# Altium PCB layout.PcbDoc
Units mm, origin at the board's own origin, x right, y up, seen from the top; angles counter-clockwise.
Board outline 118.87 x 64.13 mm, 2 copper layers (Top Layer, Bottom Layer); 58 components, 27 nets, 168 pads, 64 vias.
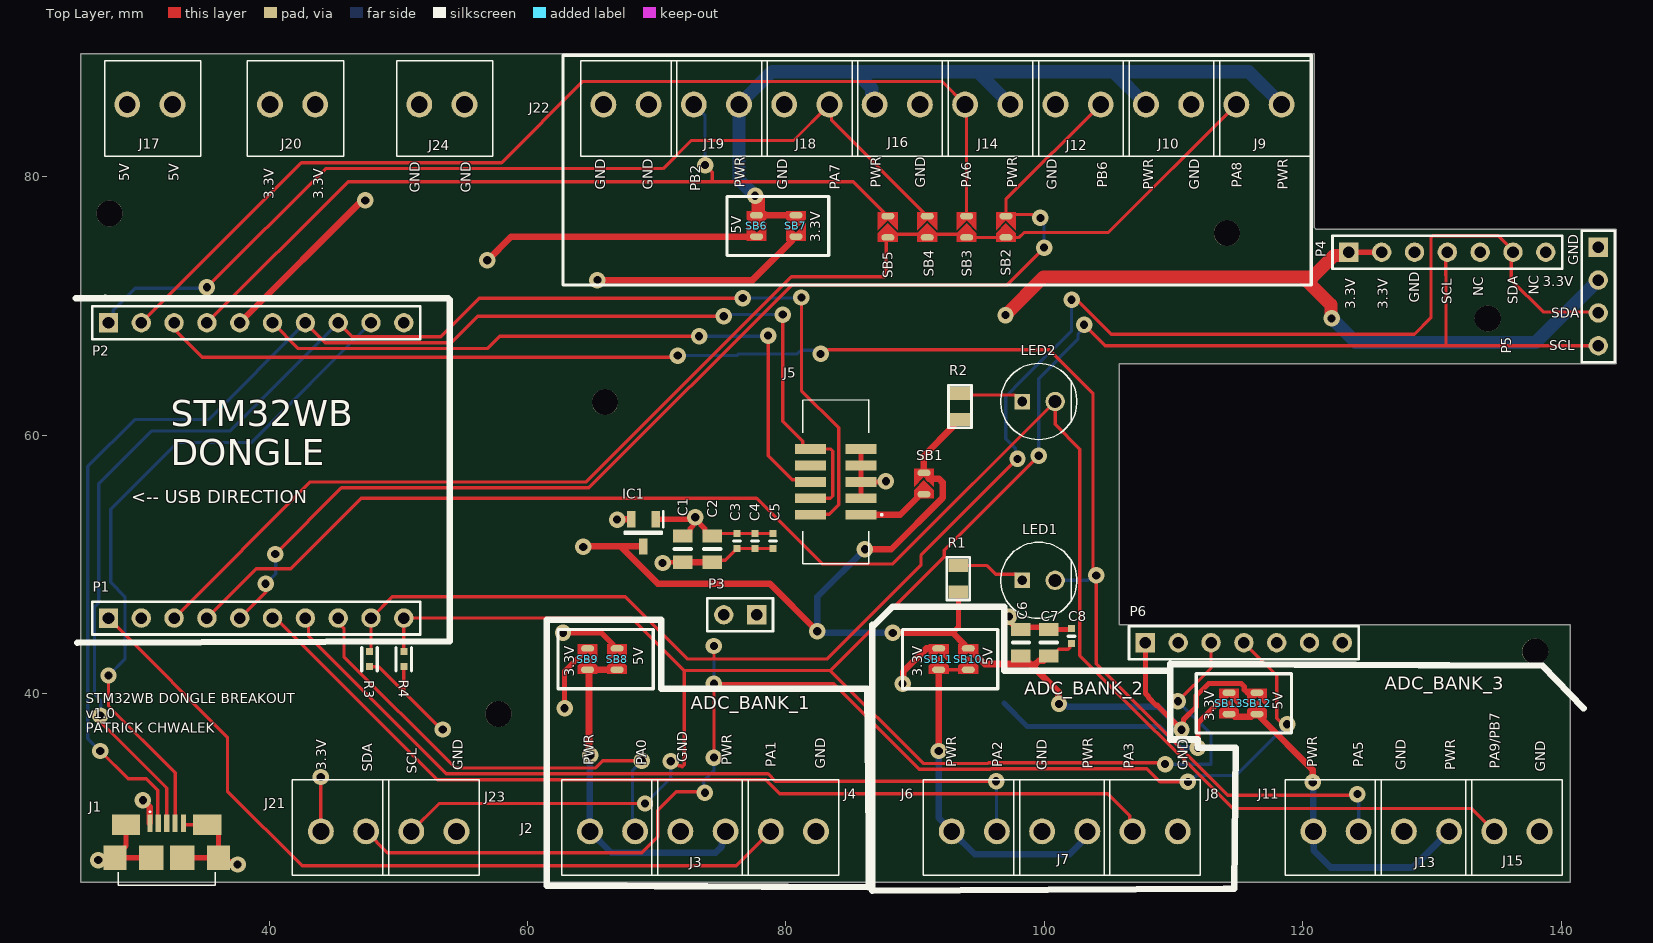
[diagram p0: Top Layer view]
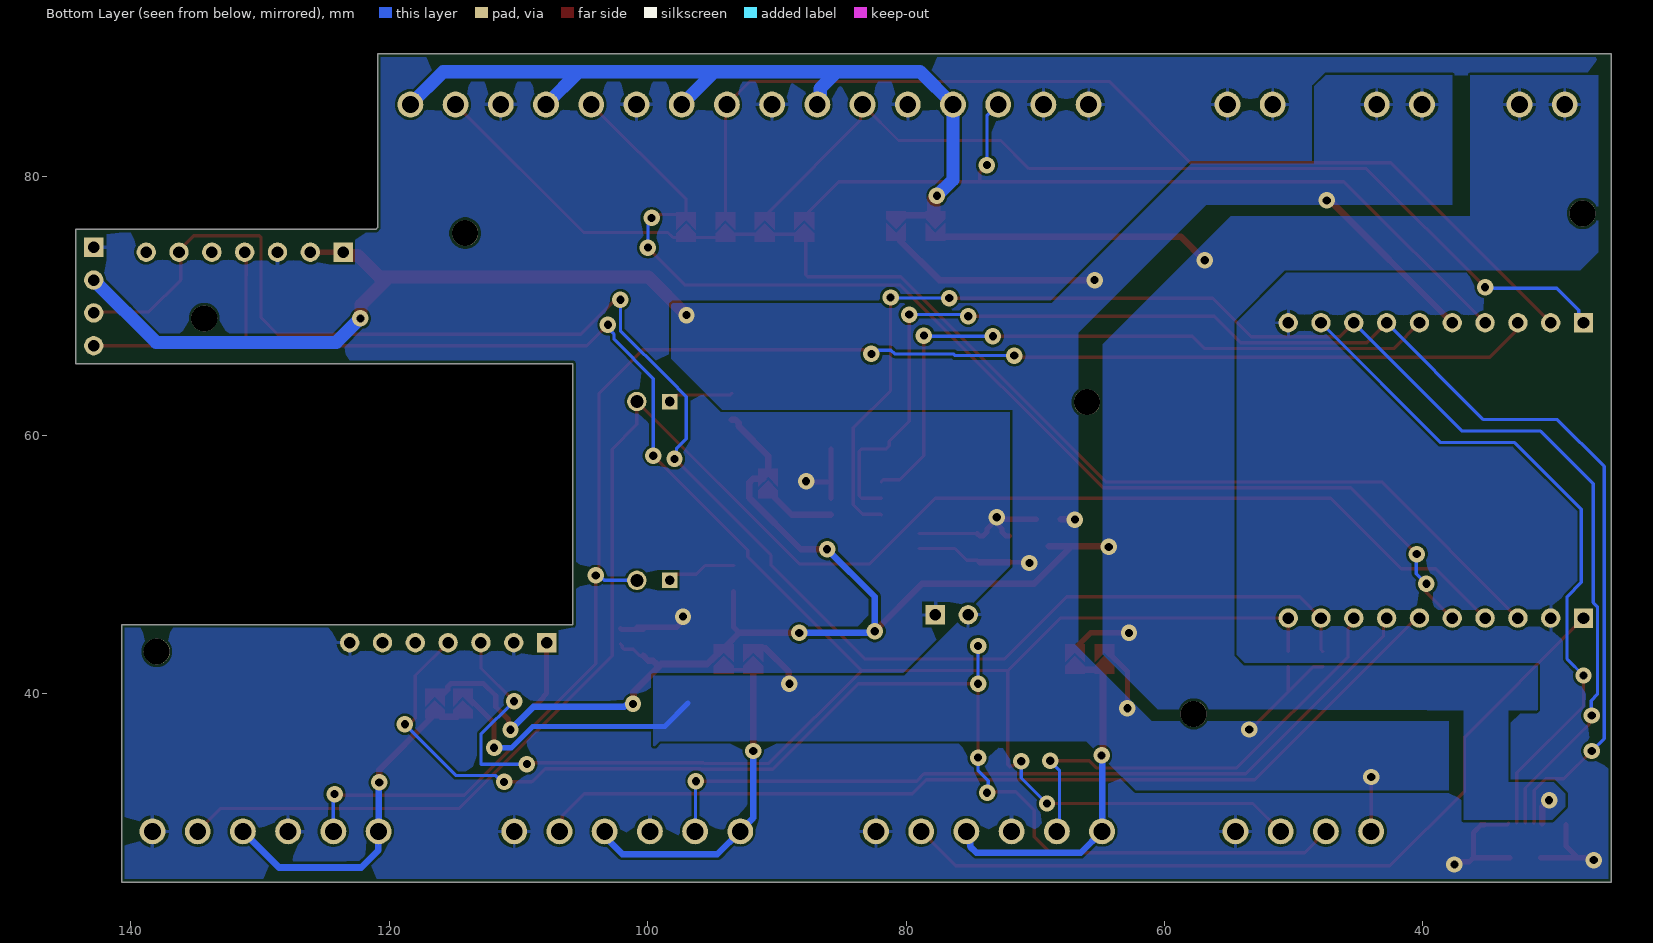
[diagram p1: Bottom Layer view, seen from below]
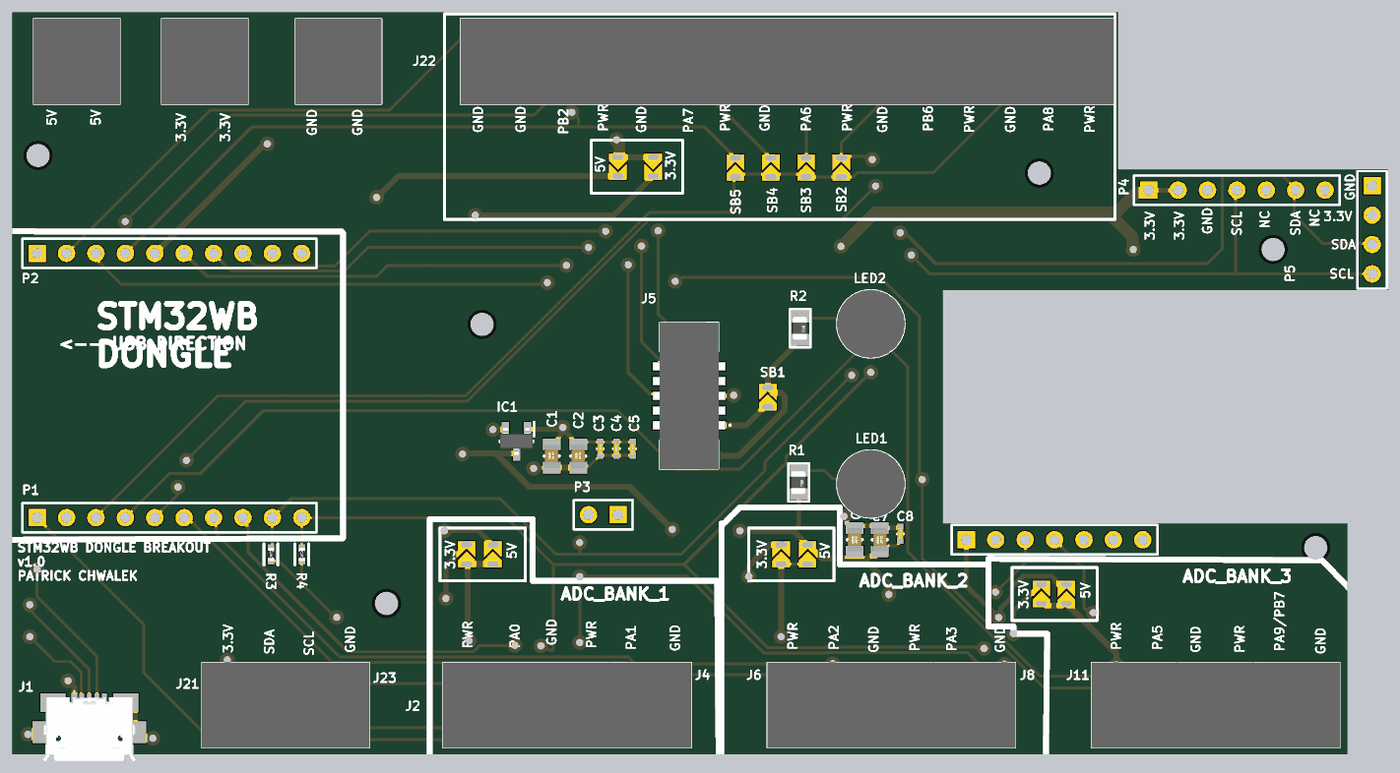
[diagram p2: 3D render of the assembled board from above, using the file's embedded part models]

## Layer stack, top to bottom
Top Solder: solder mask 0.0102, Solder Resist, Dk 3.5
Top Layer: signal copper 0.0356
Dielectric 1: dielectric 0.32, FR-4, Dk 4.8
Bottom Layer: signal copper 0.0356
Bottom Solder: solder mask 0.0102, Solder Resist, Dk 3.5

## Board outline
25.4,25.4 25.4,89.535 120.904,89.535 120.904,76.073 121.031,75.946 144.272,75.946 144.272,65.532 105.791,65.532 105.791,45.339 140.716,45.339 140.716,25.4

## Design rules (kind name [scope] priority, off if disabled: settings)
BoardOutlineClearance [All] p1: gap=0.254 ignorepadtopadclearanceinfootprint=FALSE except(0: Arc-SplitContinuation Track-SplitContinuation SMDPad-SplitContinuation THPad-SplitContinuation Via-SplitContinuation Fill-SplitContinuation Poly-SplitContinuation Region-SplitContinuation Text-SplitContinuation)
Clearance [All] p1: gap=0.203 ignorepadtopadclearanceinfootprint=FALSE except(0: Arc-Hole Track-Hole SMDPad-Hole THPad-Hole Via-Hole Fill-Hole Poly-Hole Region-Hole Text-Hole)
PlaneConnect [All] p1: planeconnectstyle=Direct reliefexpansion=0.508 reliefentries=4 reliefconductorwidth=0.254 reliefairgap=0.254
PolygonConnect [All] p1: connectstyle=Relief reliefconductorwidth=0.254 reliefentries=4 polygonreliefangle="90 Angle" airgapwidth=0.254
RoutingVias [All] p1: holewidth=0.254 width=0.508 viastyle="Through Hole" minholewidth=0.254 minwidth=0.508 maxholewidth=0.635 maxwidth=1.27
SolderMaskExpansion [All] p1: expansion=0.102 istentingtop=FALSE
Width PWR [InNet('5V')  OR InNet('3.3V')OR InNet('GND') OR InNet('ADC_BANK_1_PWR')     OR InNet('ADC_BANK_2_PWR') OR InNet('ADC_BANK_3_PWR') OR InNet('SOIL_TEMP_PWR')     or InNet('NetJ5_1')] p1: maxlimit=1.016 minlimit=0.254 preferedwidth=0.406 minimp=50.000000 maximp=50.000000 favimp=50.000000
Width [All] p2: maxlimit=0.254 minlimit=0.152 preferedwidth=0.203 minimp=50.000000 maximp=50.000000 favimp=50.000000
29 further rules are at their usual default settings.

## Classes and differential pairs
component class sch_expansion: P4 P5 P6
component class SoilSensorExpansion: J1 J2 J3 J4 J5 J6 J7 J8 J9 J10 J11 J12 J13 J14 J15 J16 J17 J18 J19 J20 J21 J22 J23 J24 LED1 LED2 P1 P2 R1 R2 R3 R4 SB1 SB2 SB3 SB4 SB5
component class sch_pwr: C1 C2 C3 C4 C5 C6 C7 C8 IC1 P3 SB6 SB7 SB8 SB9 SB10 SB11 SB12 SB13

## Components (designator, comment, footprint, x,y, rotation, side; value= is the part's Value field where it differs from the comment)
C1 "10µF" SMD-0805C 72.009,51.181 r0 top
C2 "100µF" SMD-0805C 74.295,51.181 r0 top
C3 "0.10µF" SMD-0402C 76.2,51.816 r180 top
C4 "0.47µF" SMD-0402C 77.597,51.816 r180 top
C5 "1µF" SMD-0402C 78.994,51.816 r180 top
C6 "10µF" SMD-0805C 98.181,43.942 r0 top
C7 "100µF" SMD-0805C 100.34,43.942 r0 top
C8 "0.10µF" SMD-0402C 102.108,44.45 r180 top
IC1 "MCP1700T-3302E_TT" SOT95P237X112-3N 68.961,52.451 r270 top
J1 "ZX62-B-5PA(33)" ZX62B5PA33 32.067,28.03 r0 top
J2 "691214110002S" 691214110002S 64.826,29.337 r0 top
J3 "691214110002S" 691214110002S 71.826,29.337 r0 top
J4 "691214110002S" 691214110002S 78.826,29.337 r0 top
J5 "3221-10-0300-00" 322110030000 83.865,56.388 r90 top
J6 "691214110002S" 691214110002S 92.826,29.337 r0 top
J7 "691214110002S" 691214110002S 99.826,29.337 r0 top
J8 "691214110002S" 691214110002S 106.826,29.337 r0 top
J9 "691214110002S" 691214110002S 118.364,85.598 r180 top
J10 "691214110002S" 691214110002S 111.364,85.598 r180 top
J11 "691214110002S" 691214110002S 120.826,29.337 r0 top
J12 "691214110002S" 691214110002S 104.364,85.598 r180 top
J13 "691214110002S" 691214110002S 127.826,29.337 r0 top
J14 "691214110002S" 691214110002S 97.364,85.598 r180 top
J15 "691214110002S" 691214110002S 134.826,29.337 r0 top
J16 "691214110002S" 691214110002S 90.364,85.598 r180 top
J17 "691214110002S" 691214110002S 32.512,85.598 r180 top
J18 "691214110002S" 691214110002S 83.364,85.598 r180 top
J19 "691214110002S" 691214110002S 76.364,85.598 r180 top
J20 "691214110002S" 691214110002S 43.561,85.598 r180 top
J21 "691214110002S" 691214110002S 43.998,29.337 r0 top
J22 "691214110002S" 691214110002S 69.364,85.598 r180 top
J23 "691214110002S" 691214110002S 50.998,29.337 r0 top
J24 "691214110002S" 691214110002S 55.118,85.598 r180 top
LED1 "151051BS04000" 151051BS04000 98.298,48.768 r0 top
LED2 "151051BS04000" 151051BS04000 98.298,62.611 r0 top
P1 "Header 10" HDR1X10 27.559,45.847 r0 top
P2 "Header 10" HDR1X10 27.559,68.707 r0 top
P3 "Header 2" HDR1X2 77.724,46.101 r180 top
P4 "Header 7" HDR1X7 123.571,74.168 r0 top
P5 "Header 4" HDR1X4 142.875,74.549 r270 top
P6 "Header 7" HDR1X7 107.823,43.942 r0 top
R1 "TBD" SMD-0805-RES 93.345,48.895 r180 top value=54.9k
R2 "TBD" SMD-0805-RES 93.472,62.23 r180 top value=54.9k
R3 "4.7k" SMD-0402-RES 47.752,42.672 r0 top
R4 "4.7k" SMD-0402-RES 50.419,42.672 r0 top
SB1 "SOLDER_JUMPER" JUMPER_SMD 90.678,56.515 r90 top
SB2 "SOLDER_JUMPER" JUMPER_SMD 97.028,76.391 r90 top
SB3 "SOLDER_JUMPER" JUMPER_SMD 93.98,76.391 r90 top
SB4 "SOLDER_JUMPER" JUMPER_SMD 90.932,76.391 r90 top
SB5 "SOLDER_JUMPER" JUMPER_SMD 87.884,76.391 r90 top
SB6 "SOLDER_JUMPER" JUMPER_SMD 77.724,75.946 r270 top
SB7 "SOLDER_JUMPER" JUMPER_SMD 80.772,75.946 r270 top
SB8 "SOLDER_JUMPER" JUMPER_SMD 66.929,42.926 r90 top
SB9 "SOLDER_JUMPER" JUMPER_SMD 64.643,42.926 r90 top
SB10 "SOLDER_JUMPER" JUMPER_SMD 94.107,42.926 r90 top
SB11 "SOLDER_JUMPER" JUMPER_SMD 91.821,42.926 r90 top
SB12 "SOLDER_JUMPER" JUMPER_SMD 116.459,39.497 r90 top
SB13 "SOLDER_JUMPER" JUMPER_SMD 114.3,39.497 r90 top

## Footprints (in the part's own frame and the unit in brackets; to place one, negate y for a bottom-side part, rotate by r counter-clockwise, add the part's x,y. Pads: shape width x height; smd on the part's side, far side on the other; paste and mask are expansions set on the pad)
151051BS04000 [mm]
  rect 1.2x1.2 hole 0.75: 1(0,0)
  round 1.5 hole 1: 2(2.54,0)
  silkscreen extent -1.68,-2.95 4.22,2.95, body extent -1.68,-2.95 4.22,2.95, height 9.05
322110030000 [mm]
  rect 0.76x2.4 smd: 1(-2.54,-1.95) 2(-2.54,1.95) 3(-1.27,-1.95) 4(-1.27,1.95) 5(0,-1.95) 6(0,1.95) 7(1.27,-1.95) 8(1.27,1.95) 9(2.54,-1.95) 10(2.54,1.95)
  silkscreen extent -6.35,-3.6 6.35,2.55, body extent -6.32,-3.07 6.32,3.07, height 5.9
691214110002S [mm]
  round 2 hole 1.3: 1(0,0) 2(3.5,0)
  silkscreen extent -2.2,-3.4 5.25,4, body extent -2.2,-3.4 5.25,4, height 8.8
HDR1X2 [mm] "Connector; Header; 2 Position"
  rect 1.5x1.5 hole 0.9: 1(0,0)
  round 1.5 hole 0.9: 2(2.54,0)
  silkscreen extent -1.27,-1.27 3.81,1.27
HDR1X4 [mm] "Connector; Header; 4 Position"
  rect 1.5x1.5 hole 0.9: 1(0,0)
  round 1.5 hole 0.9: 2(2.54,0) 3(5.08,0) 4(7.62,0)
  silkscreen extent -1.27,-1.27 8.89,1.27
HDR1X7 [mm] "Connector; Header; 7 Position"
  rect 1.5x1.5 hole 0.9: 1(0,0)
  round 1.5 hole 0.9: 2(2.54,0) 3(5.08,0) 4(7.62,0) 5(10.16,0) 6(12.7,0) 7(15.24,0)
  silkscreen extent -1.27,-1.27 16.51,1.27
HDR1X10 [mm] "Connector; Header; 10 Position"
  rect 1.5x1.5 hole 0.9: 1(0,0)
  round 1.5 hole 0.9: 2(2.54,0) 3(5.08,0) 4(7.62,0) 5(10.16,0) 6(12.7,0) 7(15.24,0) 8(17.78,0) 9(20.32,0) 10(22.86,0)
  silkscreen extent -1.27,-1.27 24.13,1.27
JUMPER_SMD [mil]
  oval 20x40 smd paste+0 mask+0: 1(-42.5,0) 2(22.5,0)
  Top Layer region: -55,30 -55,-30 -30,-30 0,0 -30,30
  Top Layer region: -20,30 10,0 -20,-30 35,-30 35,30
SMD-0402-RES [mm]
  rect 0.55x0.55 smd: 1(0,0.584) 2(0,-0.584)
  silkscreen extent -0.6,-0.9 0.6,0.9, body extent -0.28,-0.57 0.27,0.58, height 0.41
SMD-0402C [mm]
  rect 0.55x0.55 smd: 1(0,0.584) 2(0,-0.584)
  silkscreen extent -0.25,0 0.25,0, body extent -0.25,-0.51 0.25,0.51, height 0.51
SMD-0805-RES [mil]
  rect 60x40 smd: 1(0,40) 2(0,-40)
  silkscreen extent -35,-65 35,65, body extent -24,-39 26,39, height 31
SMD-0805C [mil]
  rect 60x40 smd: 1(0,40) 2(0,-40)
  silkscreen extent -25,0 25,0, body extent -25,-39 25,39, height 35
SOT95P237X112-3N [mm]
  rect 1.25x0.65 smd: 1(-1.05,0.95) 2(-1.05,-0.95) 3(1.05,0)
  silkscreen extent -1.68,-1.43 0.08,1.53, body extent -1.18,-1.43 1.18,1.43, height 1.12
ZX62B5PA33 [mm]
  rect 0.4x1.35 smd: 1(-1.3,1.95) 2(-0.65,1.95) 3(0,1.95) 4(0.65,1.95) 5(1.3,1.95)
  rect 2.2x1.6 smd: 6(-3.15,1.825) 7(3.15,1.825)
  rect 1.8x1.9 smd: 8(-4,-0.725) 11(4,-0.725)
  rect 1.9x1.9 smd: 9(-1.2,-0.725) 10(1.2,-0.725)
  silkscreen extent -3.75,-2.88 3.75,2.87, body extent -4.04,-3.3 4.04,2.3, height 2.78

## Part data
C1 C6: library part GCJ21BR71H683KA01L, "CAP CER 10UF 50V X7R 0805", Digi-Key Part Number=490-5807-1-ND, Manufacturer="Murata Electronics North America", Operating Temperature="-55°C ~ 125°C", Package / Case="0805 (2012 Metric)", Ratings=AEC-Q200, Temperature Coefficient=X7R, Tolerance=±10%, Voltage=50V, @ qty=0, Applications="Automotive, Boardflex Sensitive", Datasheets=http://www.murata.com/~/media/webrenewal/support/library/catalog/products/capacitor/mlcc/c03e.ashx, Factory Stock=0, Features="Soft Termination", Height - Seated (Max)=-, Image=//media.digikey.com/Renders/Murata%20Renders/0805%20(2012%20Metric)%20.85mm.jpg, Lead Spacing=-, Lead Style=-, Minimum Quantity=1, Mounting Type="Surface Mount, MLCC", Packaging="Cut Tape (CT)", Part Number=GCJ21BR71H683KA01L, Part Status=Active, Quantity Available=4490, Series=GCJ, Size / Dimension="0.079\" L x 0.049\" W (2.00mm x 1.25mm)", Thickness (Max)="0.057\" (1.45mm)", Unit Price (USD)=0.24
C2 C7: library part GCJ21BR71H683KA01L, "CAP CER 100UF 50V X7R 0805", Digi-Key Part Number=490-5807-1-ND, Manufacturer="Murata Electronics North America", Operating Temperature="-55°C ~ 125°C", Package / Case="0805 (2012 Metric)", Ratings=AEC-Q200, Temperature Coefficient=X7R, Tolerance=±10%, Voltage=50V, @ qty=0, Applications="Automotive, Boardflex Sensitive", Datasheets=http://www.murata.com/~/media/webrenewal/support/library/catalog/products/capacitor/mlcc/c03e.ashx, Factory Stock=0, Features="Soft Termination", Height - Seated (Max)=-, Image=//media.digikey.com/Renders/Murata%20Renders/0805%20(2012%20Metric)%20.85mm.jpg, Lead Spacing=-, Lead Style=-, Minimum Quantity=1, Mounting Type="Surface Mount, MLCC", Packaging="Cut Tape (CT)", Part Number=GCJ21BR71H683KA01L, Part Status=Active, Quantity Available=4490, Series=GCJ, Size / Dimension="0.079\" L x 0.049\" W (2.00mm x 1.25mm)", Thickness (Max)="0.057\" (1.45mm)", Unit Price (USD)=0.24
C3 C8: library part GCM155R71C104KA55D, "CAP CER 0.1UF 16V X7R 0402", Digi-Key Part Number=490-4759-1-ND, Manufacturer="Murata Electronics North America", Operating Temperature="-55°C ~ 125°C", Package / Case="0402 (1005 Metric)", Ratings=AEC-Q200, Temperature Coefficient=X7R, Tolerance=±10%, Voltage=16V, @ qty=0, Applications=Automotive, Datasheets=http://www.murata.com/~/media/webrenewal/support/library/catalog/products/capacitor/mlcc/c03e.ashx, Factory Stock=0, Features=-, Height - Seated (Max)=-, Image=//media.digikey.com/Renders/Murata%20Renders/ZRB-SERIES-0402.jpg, Lead Spacing=-, Lead Style=-, Minimum Quantity=1, Mounting Type="Surface Mount, MLCC", Packaging="Cut Tape (CT)", Part Number=GCM155R71C104KA55D, Part Status=Active, Quantity Available=734194, Series=GCM, Size / Dimension="0.039\" L x 0.020\" W (1.00mm x 0.50mm)", Thickness (Max)="0.022\" (0.55mm)", Unit Price (USD)=0.1
C4: library part GCM155R71C104KA55D, "CAP CER 0.47UF 16V X7R 0402", Digi-Key Part Number=490-4759-1-ND, Manufacturer="Murata Electronics North America", Operating Temperature="-55°C ~ 125°C", Package / Case="0402 (1005 Metric)", Ratings=AEC-Q200, Temperature Coefficient=X7R, Tolerance=±10%, Voltage=16V, @ qty=0, Applications=Automotive, Datasheets=http://www.murata.com/~/media/webrenewal/support/library/catalog/products/capacitor/mlcc/c03e.ashx, Factory Stock=0, Features=-, Height - Seated (Max)=-, Image=//media.digikey.com/Renders/Murata%20Renders/ZRB-SERIES-0402.jpg, Lead Spacing=-, Lead Style=-, Minimum Quantity=1, Mounting Type="Surface Mount, MLCC", Packaging="Cut Tape (CT)", Part Number=GCM155R71C104KA55D, Part Status=Active, Quantity Available=734194, Series=GCM, Size / Dimension="0.039\" L x 0.020\" W (1.00mm x 0.50mm)", Thickness (Max)="0.022\" (0.55mm)", Unit Price (USD)=0.1
C5: library part GCM155R71C104KA55D, "CAP CER 1UF 16V X7R 0402", Digi-Key Part Number=490-4759-1-ND, Manufacturer="Murata Electronics North America", Operating Temperature="-55°C ~ 125°C", Package / Case="0402 (1005 Metric)", Ratings=AEC-Q200, Temperature Coefficient=X7R, Tolerance=±10%, Voltage=16V, @ qty=0, Applications=Automotive, Datasheets=http://www.murata.com/~/media/webrenewal/support/library/catalog/products/capacitor/mlcc/c03e.ashx, Factory Stock=0, Features=-, Height - Seated (Max)=-, Image=//media.digikey.com/Renders/Murata%20Renders/ZRB-SERIES-0402.jpg, Lead Spacing=-, Lead Style=-, Minimum Quantity=1, Mounting Type="Surface Mount, MLCC", Packaging="Cut Tape (CT)", Part Number=GCM155R71C104KA55D, Part Status=Active, Quantity Available=734194, Series=GCM, Size / Dimension="0.039\" L x 0.020\" W (1.00mm x 0.50mm)", Thickness (Max)="0.022\" (0.55mm)", Unit Price (USD)=0.1
IC1: "Integrated Circuit", Arrow Part Number=MCP1700T-3302E/TT, Manufacturer_Name=Microchip, Mouser Part Number=579-MCP1700T3302E/TT, Arrow Price/Stock=https://www.arrow.com/en/products/mcp1700t-3302ett/microchip-technology, Datasheet Link=http://docs-emea.rs-online.com/webdocs/0dd1/0900766b80dd189b.pdf, Height=1.12mm, Manufacturer_Part_Number=MCP1700T-3302E/TT, Mouser Price/Stock=https://www.mouser.co.uk/ProductDetail/Microchip-Technology/MCP1700T-3302E-TT?qs=fM4xO01eazPmCNDrdHEdaw%3D%3D
J1: "Connector", Manufacturer_Name=Hirose, Mouser Part Number=798-ZX62-B-5PA33, RS Part Number=1362267, Datasheet Link=http://www.mouser.com/ds/2/185/ZX_catalog-939768.pdf, Height=2.8mm, Manufacturer_Part_Number=ZX62-B-5PA(33), Mouser Price/Stock=https://www.mouser.com/Search/Refine.aspx?Keyword=798-ZX62-B-5PA33, RS Price/Stock=http://uk.rs-online.com/web/p/products/1362267
J2 J3 J4 J6 J7 J8 J9 J10 J11 J12 J13 J14 J15 J16 J17 J18 J19 J20 J21 J22 J23 J24: "Connector", Manufacturer_Name="Wurth Elektronik", Mouser Part Number=710-691214110002S, Datasheet Link=https://katalog.we-online.de/em/datasheet/6912141100xx.pdf, Height=8.7mm, Manufacturer_Part_Number=691214110002S, Mouser Price/Stock=https://www.mouser.co.uk/ProductDetail/Wurth-Elektronik/691214110002S?qs=w%2Fv1CP2dgqrp3US926hqig%3D%3D
J5: "Connector", Manufacturer_Name="CNC Tech", Arrow Part Number=3221-10-0300-00, Arrow Price/Stock=https://www.arrow.com/en/products/3221-10-0300-00/cnc-tech-llc, Datasheet Link=http://cnctech.us/pdfs/3221-XX-0300-00.pdf, Height=5.8mm, Manufacturer_Part_Number=3221-10-0300-00
LED1 LED2: "LED", Manufacturer_Name="Wurth Elektronik", Mouser Part Number=710-151051BS04000, Datasheet Link=https://katalog.we-online.de/led/datasheet/151051BS04000.pdf, Height=8.95mm, Manufacturer_Part_Number=151051BS04000, Mouser Price/Stock=https://www.mouser.co.uk/ProductDetail/Wurth-Elektronik/151051BS04000?qs=LlUlMxKIyB3OjuZOlqaOjg%3D%3D
P1 P2: "Header, 10-Pin", LatestRevisionDate=17-Jul-2002, LatestRevisionNote="Re-released for DXP Platform.", Publisher="Altium Limited"
P3: "Header, 2-Pin", LatestRevisionDate=17-Jul-2002, LatestRevisionNote="Re-released for DXP Platform.", Publisher="Altium Limited"
P4 P6: "Header, 7-Pin", LatestRevisionDate=17-Jul-2002, LatestRevisionNote="Re-released for DXP Platform.", Publisher="Altium Limited"
P5: "Header, 4-Pin", LatestRevisionDate=17-Jul-2002, LatestRevisionNote="Re-released for DXP Platform.", Publisher="Altium Limited"
R1 R2: library part ERJ-6ENF5492V, "RES SMD 54.9K OHM 1% 1/8W 0805", Digi-Key Part Number=P54.9KCCT-ND, Manufacturer="Panasonic Electronic Components", Operating Temperature="-55°C ~ 155°C", Package / Case="0805 (2012 Metric)", Power (Watts)="0.125W, 1/8W", Supplier Device Package=0805, Temperature Coefficient=±100ppm/°C, Tolerance=±1%, @ qty=1500, Composition="Thick Film", Datasheets=http://industrial.panasonic.com/www-cgi/jvcr13pz.cgi?E+PZ+3+AOA0002+ERJ6ENF5492V+7+WW, Factory Stock=0, Failure Rate=-, Features="Automotive AEC-Q200", Height - Seated (Max)="0.028\" (0.70mm)", Image=//media.digikey.com/Renders/Panasonic%20Renders/ERJ-0805%20Pkg.jpg, Minimum Quantity=1, Number of Terminations=2, Packaging="Cut Tape (CT)", Part Number=ERJ-6ENF5492V, Part Status=Active, Quantity Available=38560, Series=ERJ, Size / Dimension="0.079\" L x 0.049\" W (2.00mm x 1.25mm)", Unit Price (USD)=0.00729
R3 R4: library part ERJ-2GEJ103X, "RES SMD 4.7K OHM 5% 1/10W 0402", Digi-Key Part Number=P10KJCT-ND, Manufacturer="Panasonic Electronic Components", Operating Temperature="-55°C ~ 155°C", Package / Case="0402 (1005 Metric)", Power (Watts)="0.1W, 1/10W", Supplier Device Package=0402, Temperature Coefficient=±200ppm/°C, Tolerance=±5%, @ qty=1500, Composition="Thick Film", Datasheets=http://industrial.panasonic.com/www-cgi/jvcr13pz.cgi?E+PZ+3+AOA0001+ERJ2GEJ103X+7+WW, Factory Stock=0, Failure Rate=-, Features="Automotive AEC-Q200", Height - Seated (Max)="0.016\" (0.40mm)", Image=//media.digikey.com/Photos/Panasonic%20Photos/ERJ-PA2-Series.jpg, Minimum Quantity=1, Number of Terminations=2, Packaging="Cut Tape (CT)", Part Number=ERJ-2GEJ103X, Part Status=Active, Quantity Available=2560215, Series=ERJ, Size / Dimension="0.039\" L x 0.020\" W (1.00mm x 0.50mm)", Unit Price (USD)=0.00350

## Free pads (board coordinates)
  round 2.02 hole 2.02 unplated mask+0.254: 1(27.638,77.168) 1(57.737,38.433) 1(65.992,62.563) 1(114.125,75.644) 1(134.318,69.04) 1(138.001,43.259)

## Via types
v1: diameter 1.27, hole 0.635, Top Layer to Bottom Layer, tented both sides, 64 vias

## Nets (pads, with @x,y where several pads share a name; then routed paths per layer and width w, separated by ;. In a path a pad name is that pad's centre, name@x,y a point inside that pad or via, vN(x,y) a via of type N, cw(c..) or ccw(c..) an arc to the next point about the centre after c; other vN are vias at no path point)
3.3V: C1.2 C2.2 C3.1 C4.1 C5.1 IC1.2 J20.1 J20.2 J21.1 P2.5 P3.2 P4.1 P4.2 P5.2 R3.2 R4.2 SB7.2 SB9.2 SB11.2 SB13.2 | length 145.4
  Top Layer w0.254: v1(43.991,33.55) 43.998,33.543 J21.1 ; R3.2 48.463,42.088 50.419,40.132 ; R4.2 50.419,40.132 ; v1(53.436,37.223) 53.352,37.223 53.34,37.211 50.419,40.132 ; v1(70.447,50.114) v1@70.498,50.165 ; C2.2 74.451,50.321 75.289,50.321 C3.1 C4.1 C5.1
  Top Layer w0.356: v1@70.498,50.165 C1.2
  Top Layer w0.406: v1(62.865,38.862) 62.865,41.723 64.37,43.227 64.37,43.451 64.416,43.497 SB9.2 ; v1(111.887,35.814) 111.887,37.719 114.027,39.859 114.027,40.022 114.073,40.069 SB13.2 ; P4.1 P4.2
  Top Layer w0.508: P2.5 47.371,78.359 47.371,78.243 v1(47.441,78.174) ; v1(65.405,72.009) 77.406,72.009 80.518,75.12 80.518,75.374 SB7.2 ; v1(66.929,53.467) 66.946,53.484 67.994,53.484 IC1.2 ; C1.2 C2.2 ; v1(89.027,40.767) 89.062,40.802 89.062,41.691 90.868,43.497 SB11.2
  Top Layer w1.016: v1(96.99,69.303) 99.949,72.263 120.015,72.263 ; v1(122.234,69.041) 122.234,69.021 122.174,68.961 122.174,70.104 120.015,72.263 ; P4.1 123.329,73.926 122.44,73.926 120.777,72.263 120.015,72.263
  Bottom Layer w0.406: 96.875,39.269 98.679,37.465 108.89,37.465 110.541,35.814 v1(111.887,35.814) ; v1(96.99,69.303) v1@97.028,69.342
  Bottom Layer w1.016: v1(122.234,69.041) 124.093,67.183 138.049,67.183 P5.2
5V: C6.2 C7.2 C8.1 IC1.3 J1.1 J17.1 J17.2 P6.1 R1.1 R2.1 SB1.2 SB6.2 SB8.2 SB10.2 SB12.2 | length 129.6
  Top Layer w0.254: C7.2@100.33,42.926 C7.2@100.335,42.931 ; C7.2 100.594,42.926 101.102,43.434 101.832,43.434 101.96,43.562 101.96,43.718 C8.1
  Top Layer w0.406: v1(62.738,44.704) 65.722,44.704 66.656,43.771 66.656,43.544 66.702,43.497 SB8.2 ; 92.9,44.704 93.345,45.148 R1.1 ; P6.1 107.823,40.005 108.052,39.776 108.052,39.701 108.662,39.091 108.737,39.091 v1(110.617,37.211) 110.773,37.367 110.773,38.002 111.76,38.989 111.76,39.83 112.722,40.792 115.23,40.792 115.468,40.554 115.468,40.307 115.706,40.069 SB12.2
  Top Layer w0.508: v1(30.226,31.75) 30.767,31.209 J1.1 ; v1(56.884,73.547) 56.884,73.545 56.896,73.533 58.737,75.374 SB6.2 ; v1(64.308,51.354) 64.355,51.401 67.186,51.401 ; IC1.3 67.186,51.401 ; v1(82.423,44.831) 78.74,48.514 70.073,48.514 67.186,51.401 ; v1(86.106,51.181) 88.15,51.181 92.119,55.15 92.119,56.344 91.821,56.642 91.059,56.642 ; v1(88.265,44.704) 92.9,44.704 93.853,43.752 93.853,43.497 SB10.2 ; SB1.2 90.678,58.42 92.964,60.706 92.964,60.96 93.218,61.214 R2.1 ; SB10.2@94.296,43.383 95.389,42.291 98.933,42.291 101.094,40.13 101.094,39.241 v1(101.13,39.205) ; 99.314,42.291 99.568,42.545 99.949,42.545 C7.2@100.33,42.926
  Bottom Layer w0.508: v1(86.106,51.181) 82.423,47.498 v1(82.423,44.831) 82.55,44.704 v1(88.265,44.704) ; v1(101.13,39.205) 101.275,39.06 101.738,39.06 101.808,38.989 108.839,38.989 v1(110.617,37.211)
ADC_BANK_1_PWR: J2.1 J3.2 SB8.1 SB9.1 | length 27
  Top Layer w0.508: SB9.1 SB9.1@64.862,41.846 ; v1(64.862,35.217) 64.752,35.326 64.752,41.846 SB9.1@64.862,41.846 ; SB8.1@66.611,41.846 SB9.1@64.862,41.846
  Bottom Layer w0.508: v1(64.862,35.217) 64.826,35.181 J2.1 66.477,27.686 74.549,27.686 75.041,28.178 75.041,29.052 J3.2
ADC_BANK_2_PWR: J6.1 J7.2 SB10.1 SB11.1 | length 27.8
  Top Layer w0.254: SB11.1 SB10.1
  Top Layer w0.508: 91.741,42.151 91.741,41.846 SB11.1 v1(91.821,35.56)
  Bottom Layer w0.508: v1(91.821,35.56) 91.821,30.381 92.826,29.376 J6.1 94.604,27.559 101.952,27.559 103.326,28.933 J7.2
ADC_BANK_3_PWR: J11.1 J13.2 SB12.1 SB13.1 | length 27
  Top Layer w0.508: SB13.1 114.554,38.417 114.745,38.227 116.014,38.227 116.205,38.417 116.713,38.417 116.713,38.163 120.779,34.097 v1(120.779,33.125)
  Bottom Layer w0.508: v1(120.779,33.125) 120.777,33.122 120.777,33.02 120.826,32.971 J11.1 120.841,29.322 120.841,27.876 122.174,26.543 128.532,26.543 J13.2
GND: C1.1 C2.1 C3.2 C4.2 C5.2 C6.1 C7.1 C8.2 IC1.1 J1.5 J1.6 J1.7 J1.8 J1.9 J1.10 J1.11 J3.1 J4.2 J5.3 J5.5 J5.7 J5.9 J7.1 J8.2 J10.1 J12.2 J13.1 J15.2 J16.1 J18.2 J22.1 J22.2 J23.2 J24.1 J24.2 P1.2 P2.10 P3.1 P4.3 P5.1 P6.2 P6.7 | length 40
  Top Layer w0.254: J1.5 33.367,29.928 33.44,29.855 J1.7 ; C2.1@74.498,52.4 C3.2 C4.2 C5.2
  Top Layer w0.406: v1(26.773,27.113) 26.965,27.305 J1.8 ; J1.6 28.917,28.205 28.067,27.355 J1.8 ; J1.9 J1.8 ; J1.10 J1.11 ; J1.7 35.47,29.855 36.067,29.258 J1.11 ; v1(37.553,26.775) 37.339,26.99 36.382,26.99 J1.11 ; IC1.1 v1@72.823,53.501 ; C1.1 72.263,52.197 72.568,52.502 72.568,52.756 72.809,52.997 72.809,53.486 v1@72.823,53.501 ; C2.1@74.498,52.4 C2.1 74.041,52.197 73.736,52.502 73.736,52.756 72.974,53.518 v1(72.974,53.651) v1@72.823,53.501 ; J5.3 J5.5 ; J5.9 J5.7 J5.5 ; v1(87.731,56.431) 87.688,56.388 J5.5 ; v1(97.262,45.96) 97.427,45.795 97.427,45.457 97.753,45.131 C7.1@100.796,45.131 ; C7.1 102.032,44.958 C8.2
NetJ1_2: J1.2 J5.4 J5.10 P2.7 | length 109.2
  Top Layer w0.254: v1(26.924,35.56) 29.083,33.401 30.48,33.401 31.369,32.512 31.369,30.028 J1.2 ; P2.7 44.336,67.17 54.089,67.17 56.134,69.215 v1(75.184,69.215) ; v1(79.756,69.342) 79.756,61.087 81.303,59.54 81.303,59.181 81.556,58.928 83.468,58.928 83.617,58.779 83.617,55.296 83.439,55.118 J5.4
  Bottom Layer w0.254: v1(26.924,35.56) 25.959,36.525 25.959,57.582 29.591,61.214 35.306,61.214 P2.7 ; v1(75.184,69.215) 75.311,69.342 v1(79.756,69.342)
NetJ1_3: J1.3 J5.2 P2.8 | length 109.8
  Top Layer w0.254: v1(26.924,38.31) 27.118,38.115 27.118,37.643 27.925,36.837 32.067,32.695 J1.3 ; P2.8 46.419,67.627 53.276,67.627 56.261,70.612 76.708,70.612 76.702,70.618 v1(76.659,70.618) ; v1(81.194,70.663) 81.194,63.459 84.074,60.579 84.074,54.61 83.347,53.883 81.95,53.883 J5.2
  Bottom Layer w0.254: v1(26.924,38.31) 26.968,38.354 26.968,39.453 26.479,39.942 26.479,46.734 26.797,47.052 26.797,56.239 30.883,60.325 36.957,60.325 P2.8 ; v1(76.659,70.618) 81.113,70.618 81.158,70.663 v1(81.194,70.663)
NetJ1_4: J1.4 P2.9 | length 53.5
  Top Layer w0.254: v1(27.559,41.402) 27.559,39.04 32.717,33.882 J1.4
  Bottom Layer w0.254: v1(27.559,41.402) 28.829,42.672 28.829,47.498 27.724,48.603 27.724,54.267 32.893,59.436 38.608,59.436 P2.9
NetJ2_2: J2.2 P1.8 | length 36
  Top Layer w0.254: P1.8 45.339,45.52 45.783,45.075 45.783,42.862 54.395,34.251 65.261,34.251 65.808,34.798 v1(68.834,34.798) ; J2.2 J2.2@68.418,29.429
  Bottom Layer w0.254: J2.2 68.123,29.54 68.123,34.072 68.834,34.784 v1(68.834,34.798)
NetJ4_1: J4.1 P1.1 | length 62.8
  Top Layer w0.254: P1.1 28.182,45.224 36.766,36.639 36.766,32.449 42.545,26.67 76.159,26.67 J4.1
NetJ5_1: J5.1 SB1.1 | length 5.5
  Top Layer w0.508: J5.1 88.837,53.848 90.424,55.435 SB1.1
NetJ5_6: J5.6 P2.6 | length 53.3
  Top Layer w0.254: P2.6 42.254,66.712 56.886,66.712 57.835,67.661 v1(73.277,67.661) ; v1(78.619,67.714) 78.619,58.414 80.483,56.55 81.753,56.55 J5.6
  Bottom Layer w0.254: P2.6 P2.6@40.513,68.707 ; v1(73.277,67.661) 78.566,67.661 v1(78.619,67.714)
NetJ6_2: J6.2 P1.7 | length 63.4
  Top Layer w0.254: P1.7 43.037,45.609 43.037,44.466 53.709,33.794 78.612,33.794 79.183,33.223 v1(96.266,33.223) ; J6.2@96.266,29.397 J6.2
  Bottom Layer w0.254: v1(96.266,33.223) 96.296,33.193 96.296,29.367 J6.2
NetJ8_1: J8.1 P1.6 | length 74
  Top Layer w0.254: P1.6 40.513,45.847 53.023,33.337 78.423,33.337 79.502,32.258 104.902,32.258 106.602,30.558 106.602,29.561 J8.1
NetJ9_2: J9.2 P1.3 SB2.1 SB3.1 SB4.1 SB5.1 | length 101.1
  Top Layer w0.254: P1.3 43.18,56.388 64.548,56.388 76.236,68.076 80.423,72.263 87.608,72.263 87.757,72.412 87.757,75.311 87.757,75.543 87.906,75.692 88.37,75.692 88.509,75.552 90.792,75.552 91.059,75.819 91.291,75.819 91.557,75.552 93.45,75.552 93.692,75.311 SB3.1 SB2.1 98.044,75.311 98.425,75.692 104.958,75.692 J9.2
NetJ11_2: J11.2 LED1.2 P2.3 | length 126.9
  Top Layer w0.254: P2.3 32.877,68.469 32.877,67.982 34.671,66.189 34.82,66.04 71.374,66.04 71.628,66.294 v1(71.628,66.167) ; v1(82.677,66.294) 82.952,66.294 83.282,66.624 100.381,66.624 103.759,63.246 103.759,49.298 103.908,49.149 v1(104.013,49.149) 104.013,42.323 114.205,32.131 124.231,32.131 124.368,32.131 124.46,32.131 124.368,32.223 v1(124.231,32.223)
  Bottom Layer w0.254: v1(71.628,66.167) 76.2,66.167 76.327,66.294 80.878,66.294 81.17,66.586 82.11,66.586 82.402,66.294 v1(82.677,66.294) ; LED1.2 103.357,48.768 103.738,49.149 v1(104.013,49.149) ; v1(124.231,32.223) 124.326,32.128 J11.2
NetJ12_1: J12.1 P1.5 SB2.2 | length 91.8
  Top Layer w0.254: P1.5 39.723,47.851 v1(39.723,48.499) ; v1(40.46,50.803) 45.588,55.931 64.737,55.931 80.435,71.628 97.08,71.628 v1(99.977,74.525) ; SB2.2 97.028,78.262 J12.1 ; 97.663,76.962 97.79,77.089 99.038,77.089 99.108,77.019 99.501,77.019 v1(99.695,76.825)
  Bottom Layer w0.254: v1(39.723,48.499) 40.513,49.288 40.513,50.8 40.463,50.8 v1(40.46,50.803) ; v1(99.695,76.825) 99.695,76.55 99.977,76.268 v1(99.977,74.525)
NetJ14_2: J14.2 P2.2 SB3.2 | length 80.9
  Top Layer w0.254: P2.2 42.494,81.102 57.988,81.102 64.271,87.385 92.077,87.385 J14.2 93.98,85.482 SB3.2
NetJ15_1: J15.1 LED2.2 P1.4 | length 135
  Top Layer w0.254: P1.4 38.989,49.657 41.656,49.657 47.117,55.118 77.724,55.118 82.804,50.038 88.265,50.038 LED2.2 100.838,60.833 102.743,58.928 102.743,42.946 114.574,31.115 133.048,31.115 J15.1
NetJ18_1: J18.1 P2.1 SB4.2 | length 75.2
  Top Layer w0.254: v1(35.175,71.454) 44.366,80.645 70.485,80.645 72.655,82.815 80.581,82.815 J18.1 83.528,85.434 83.528,84.366 90.629,77.265 90.629,77.079 90.747,76.962 SB4.2
  Bottom Layer w0.254: P2.1 27.928,69.076 27.928,69.689 29.613,71.374 34.925,71.374 35.052,71.247 35.175,71.37 v1(35.175,71.454)
NetJ19_2: J19.2 P2.4 SB5.2 | length 65
  Top Layer w0.254: P2.4 46.101,79.629 74.295,79.629 ; v1(73.739,80.907) 74.295,80.351 74.295,79.629 ; SB5.2 87.699,76.962 87.581,77.079 87.581,77.265 85.217,79.629 74.295,79.629
  Bottom Layer w0.254: J19.2 73.739,84.723 v1(73.739,80.907)
NetJ21_2: J21.2 P1.9 P4.6 P5.3 P6.4 R3.1 | length 229.8
  Top Layer w0.254: J21.2 49.149,27.686 68.834,27.686 70.076,28.928 70.076,30.96 71.511,32.395 73.65,32.395 v1(73.723,32.322) ; R3.1 47.879,43.383 P1.9 49.53,47.498 67.564,47.498 72.39,42.672 74.422,42.672 ; v1(74.422,35.052) v1(74.422,40.767) 83.693,40.767 90.322,34.138 95.815,34.138 95.866,34.188 107.925,34.188 108.943,33.17 v1(111.11,33.17) ; v1(74.422,43.688) 74.422,42.672 ; v1(97.917,58.166) 90.448,50.697 90.448,49.947 83.173,42.672 74.422,42.672 ; v1(102.108,70.485) 102.302,70.291 102.705,70.291 105.178,67.818 128.651,67.818 129.921,69.088 129.921,75.289 130.07,75.438 135.128,75.438 136.017,74.549 136.144,74.549 136.144,72.009 138.608,69.545 142.799,69.545 P5.3 ; P6.4 117.983,41.402 117.983,38.1 118.513,37.57 118.723,37.57 v1(118.787,37.634)
  Bottom Layer w0.254: v1(73.723,32.322) 73.635,32.41 73.635,33.248 74.422,34.035 v1(74.422,35.052) ; v1(74.422,40.767) v1(74.422,43.688) ; v1(97.917,58.166) 97.77,58.313 97.77,58.948 97.006,59.712 97.006,62.986 98.343,64.323 102.108,68.088 v1(102.108,70.485) ; v1(111.11,33.17) 111.281,33.17 111.766,33.655 114.808,33.655 v1(118.787,37.634)
NetJ23_1: J23.1 P1.10 P4.4 P5.4 P6.3 R4.1 | length 196
  Top Layer w0.254: R4.1 P1.10 68.072,45.847 72.136,41.783 ; J23.1 53.157,31.496 v1(69.088,31.496) ; v1(71.076,34.759) 71.351,34.759 71.698,34.412 71.871,34.412 71.947,34.337 71.987,34.337 72.136,34.486 72.136,41.783 ; v1(99.568,58.42) 92.253,51.105 92.253,50.597 83.439,41.783 ; v1(103.073,68.558) 104.702,66.929 131.064,66.929 ; v1(109.347,34.544) 109.245,34.646 95.677,34.646 95.626,34.595 90.627,34.595 83.439,41.783 ; v1(110.337,39.417) 112.903,41.983 P6.3 ; P4.4@131.064,74.549 131.064,72.39 131.086,72.368 131.086,66.951 131.064,66.929 ; P5.4 131.064,66.929 ; 72.136,41.783 83.439,41.783
  Bottom Layer w0.254: v1(69.088,31.496) 69.111,31.496 71.085,33.47 71.085,34.751 v1(71.076,34.759) ; v1(99.568,58.42) 99.568,64.389 102.597,67.418 102.597,67.806 103.073,68.283 v1(103.073,68.558) ; v1(109.347,34.544) 112.903,34.544 112.903,36.851 v1(110.337,39.417)
NetLED1_1: LED1.1 R1.2 | length 5.4
  Top Layer w0.254: R1.2 95.567,49.911 96.237,49.241 97.825,49.241 LED1.1
NetLED2_1: LED2.1 R2.2 | length 5.1
  Top Layer w0.254: R2.2 93.599,63.119 97.676,63.119 97.711,63.084 97.825,63.084 LED2.1
SOIL_TEMP_PWR: J9.1 J10.2 J14.1 J16.2 J19.1 SB6.1 SB7.1 | length 67
  Top Layer w0.508: v1(77.61,78.531) v1@77.851,78.29 ; SB6.1 SB6.1@77.851,77.025 ; 77.851,76.708 SB6.1@77.851,77.025 ; SB7.1 SB6.1@77.851,77.025
  Top Layer w1.016: SB6.1@77.851,77.025 v1@77.851,78.29
  Bottom Layer w0.508: J16.2@86.636,85.826 J16.2
  Bottom Layer w1.016: v1(77.61,78.531) 76.364,79.777 J19.1 78.904,88.138 85.344,88.138 ; J16.2@86.636,85.826 86.636,86.846 85.344,88.138 ; J14.1 94.824,88.138 ; J10.2 105.324,88.138 ; J9.1 115.824,88.138 105.324,88.138 ; 85.344,88.138 94.824,88.138 ; 94.824,88.138 105.324,88.138
pads on no net: J5.8 P4.5 P4.7 P6.5 P6.6

## Polygon pours and split planes (outlines as drawn)
GND on Bottom Layer "GND_L02_P004" (solid, remove dead copper, pour order 4): 24.511,93.472 24.257,93.218 24.257,22.987 148.59,22.987 149.225,23.622 149.225,93.472
3.3V on Bottom Layer "3.3V_L02_P003" (solid, pour order 3): 37.973,32.512 37.973,37.846 60.96,37.846 66.929,43.815 66.675,44.069 66.675,67.945 56.769,77.851 37.719,77.851 37.719,87.884 47.498,87.884 48.387,86.995 48.387,81.026 57.912,81.026 68.707,70.231 98.044,70.231 98.171,70.104 98.171,65.913 94.234,61.976 71.755,61.976 71.755,49.784 80.137,41.402 99.568,41.402 99.568,35.814 99.06,36.322 66.04,36.322 62.23,32.512
5V on Bottom Layer "5V_L02_P001" (solid, pour order 1): 31.115,38.66 31.115,42.164 53.848,42.164 54.61,42.926 54.61,68.834 50.673,72.771 27.813,72.771 26.416,74.168 26.416,87.884 36.322,87.884 36.322,76.962 54.864,76.962 64.77,67.056 64.77,43.053 60.521,38.804
5V on Bottom Layer "5V_L02_P002" (solid, pour order 2): 33.401,38.989 33.401,33.147 29.845,33.147 28.956,32.258 28.956,31.242 29.972,30.226 36.83,30.226 36.83,38.989

## Silkscreen, mask and mechanical layers (free items; w line width, h text height)
Top Overlay:
  lines w0.254: 62.357,40.386 69.723,40.386 69.723,44.958 62.357,44.958 62.357,40.386 ; 62.738,71.628 120.65,71.628 120.65,89.408 62.738,89.408 62.738,71.628 ; 75.438,73.914 83.312,73.914 83.312,78.486 75.438,78.486 75.438,73.914 ; 89.027,40.386 96.393,40.386 96.393,44.958 89.027,44.958 89.027,40.386 ; 111.76,36.957 119.126,36.957 119.126,41.529 111.76,41.529 111.76,36.957
  lines w0.508: 25.019,70.612 27.31,70.622 27.332,70.6 53.86,70.6 53.975,70.485 53.975,44.069 25.146,43.942 ; 141.732,38.862 138.557,42.164 109.728,42.291 109.728,41.783 ; 86.329,36.544 86.298,40.386 70.358,40.386 70.358,45.72 61.468,45.72 61.468,25.146 86.423,25.02 86.392,28.861 86.329,36.544 ; 86.329,36.544 86.329,36.544 ; 109.728,41.783 96.901,41.783 96.901,46.736 88.265,46.736 86.664,45.135 86.664,45.339 86.664,24.757 113.919,24.892 114.681,24.892 114.808,35.814 111.887,35.814 111.887,36.195 111.887,36.449 109.728,36.449 109.728,41.783
  text "5V" at 29.185,79.654 h0.76 r90
  text "5V" at 32.995,79.654 h0.76 r90
  text "PWR" at 76.81,79.146 h0.76 r90
  text "PWR" at 87.351,79.146 h0.76 r90
  text "GND" at 90.78,79.146 h0.76 r90
  text "PA6" at 94.336,79.146 h0.76 r90
  text "PWR" at 97.892,79.146 h0.76 r90
  text "PB6" at 104.877,79.146 h0.76 r90
  text "PA8" at 115.291,79.146 h0.76 r90
  text "GND" at 66.015,79.019 h0.76 r90
  text "GND" at 69.698,79.019 h0.76 r90
  text "GND" at 80.112,79.019 h0.76 r90
  text "PA7" at 84.176,79.019 h0.76 r90
  text "GND" at 100.94,79.019 h0.76 r90
  text "PWR" at 108.433,79.019 h0.76 r90
  text "GND" at 111.989,79.019 h0.76 r90
  text "PWR" at 118.847,79.019 h0.76 r90
  text "PB2" at 73.381,78.892 h0.76 r90
  text "GND" at 51.664,78.765 h0.76 r90
  text "GND" at 55.601,78.765 h0.76 r90
  text "3.3V" at 40.361,78.257 h0.76 r90
  text "3.3V" at 44.171,78.257 h0.76 r90
  text "5V" at 76.556,75.59 h0.76 r90
  text "3.3V" at 82.652,74.955 h0.76 r90
  text "GND" at 141.326,73.177 h0.76 r90
  text "3.3V" at 138.582,71.526 h0.76
  text "NC" at 138.278,70.891 h0.76 r90
  text "NC" at 133.96,70.764 h0.76 r90
  text "GND" at 129.007,70.256 h0.76 r90
  text "SCL" at 131.547,70.129 h0.76 r90
  text "SDA" at 136.627,70.129 h0.76 r90
  text "3.3V" at 124.054,69.748 h0.76 r90
  text "3.3V" at 126.594,69.748 h0.76 r90
  text "SDA" at 139.217,69.113 h0.76
  text "SCL" at 139.09,66.573 h0.76
  text "STM32WB / DONGLE" at 32.385,57.658 h2.03
  text "<-- USB DIRECTION" at 29.337,54.737 h1.02
  text "5V" at 68.936,42.189 h0.76 r90
  text "5V" at 95.987,42.189 h0.76 r90
  text "3.3V" at 90.547,41.324 h0.76 r90
  text "3.3V" at 63.602,41.3 h0.76 r90
  text "ADC_BANK_3" at 126.365,40.301 h1.02
  text "ADC_BANK_2" at 98.425,39.92 h1.02
  text "ADC_BANK_1" at 72.644,38.777 h1.02
  text "5V" at 118.466,38.76 h0.76 r90
  text "3.3V" at 113.132,37.871 h0.76 r90
  text "STM32WB DONGLE BREAKOUT / v1.0 / PATRICK CHWALEK" at 25.781,36.957 h0.76
  text "GND" at 72.365,34.696 h0.76 r90
  text "PWR" at 65.126,34.442 h0.76 r90
  text "PA0" at 69.19,34.442 h0.76 r90
  text "PWR" at 75.794,34.442 h0.76 r90
  text "PA1" at 79.223,34.315 h0.76 r90
  text "PWR" at 93.193,34.315 h0.76 r90
  text "PA2" at 96.749,34.315 h0.76 r90
  text "PWR" at 121.133,34.315 h0.76 r90
  text "PA5" at 124.689,34.315 h0.76 r90
  text "GND" at 83.033,34.188 h0.76 r90
  text "PWR" at 103.734,34.188 h0.76 r90
  text "PA3" at 106.909,34.188 h0.76 r90
  text "PA9/PB7" at 135.23,34.188 h0.76 r90
  text "3.3V" at 44.425,34.061 h0.76 r90
  text "GND" at 54.966,34.061 h0.76 r90
  text "GND" at 100.178,34.061 h0.76 r90
  text "GND" at 111.1,34.061 h0.76 r90
  text "GND" at 127.991,34.061 h0.76 r90
  text "PWR" at 131.801,34.061 h0.76 r90
  text "SDA" at 47.981,33.934 h0.76 r90
  text "GND" at 138.786,33.934 h0.76 r90
  text "SCL" at 51.41,33.807 h0.76 r90
Mechanical 1:
  lines w0.254: 105.918,42.164 140.664,42.164 140.664,64.91 105.918,64.91 105.918,42.164 ; 122.208,73.152 122.208,89.898 139.954,89.898 139.954,73.152 122.208,73.152
Mechanical BO:
  the board outline again, w0.003